# Altium PCB SUBBOARD-power_stage.PcbDoc (part 1 of 2)
Units mm, origin at the board's own origin, x right, y up, seen from the top; angles counter-clockwise.
Board outline 150 x 85 mm, 2 copper layers (Top Layer, Bottom Layer), stack 1.569 mm thick; 73 components, 29 nets, 169 pads, 334 vias.
Unrouted connection lines stored in the file: 3.
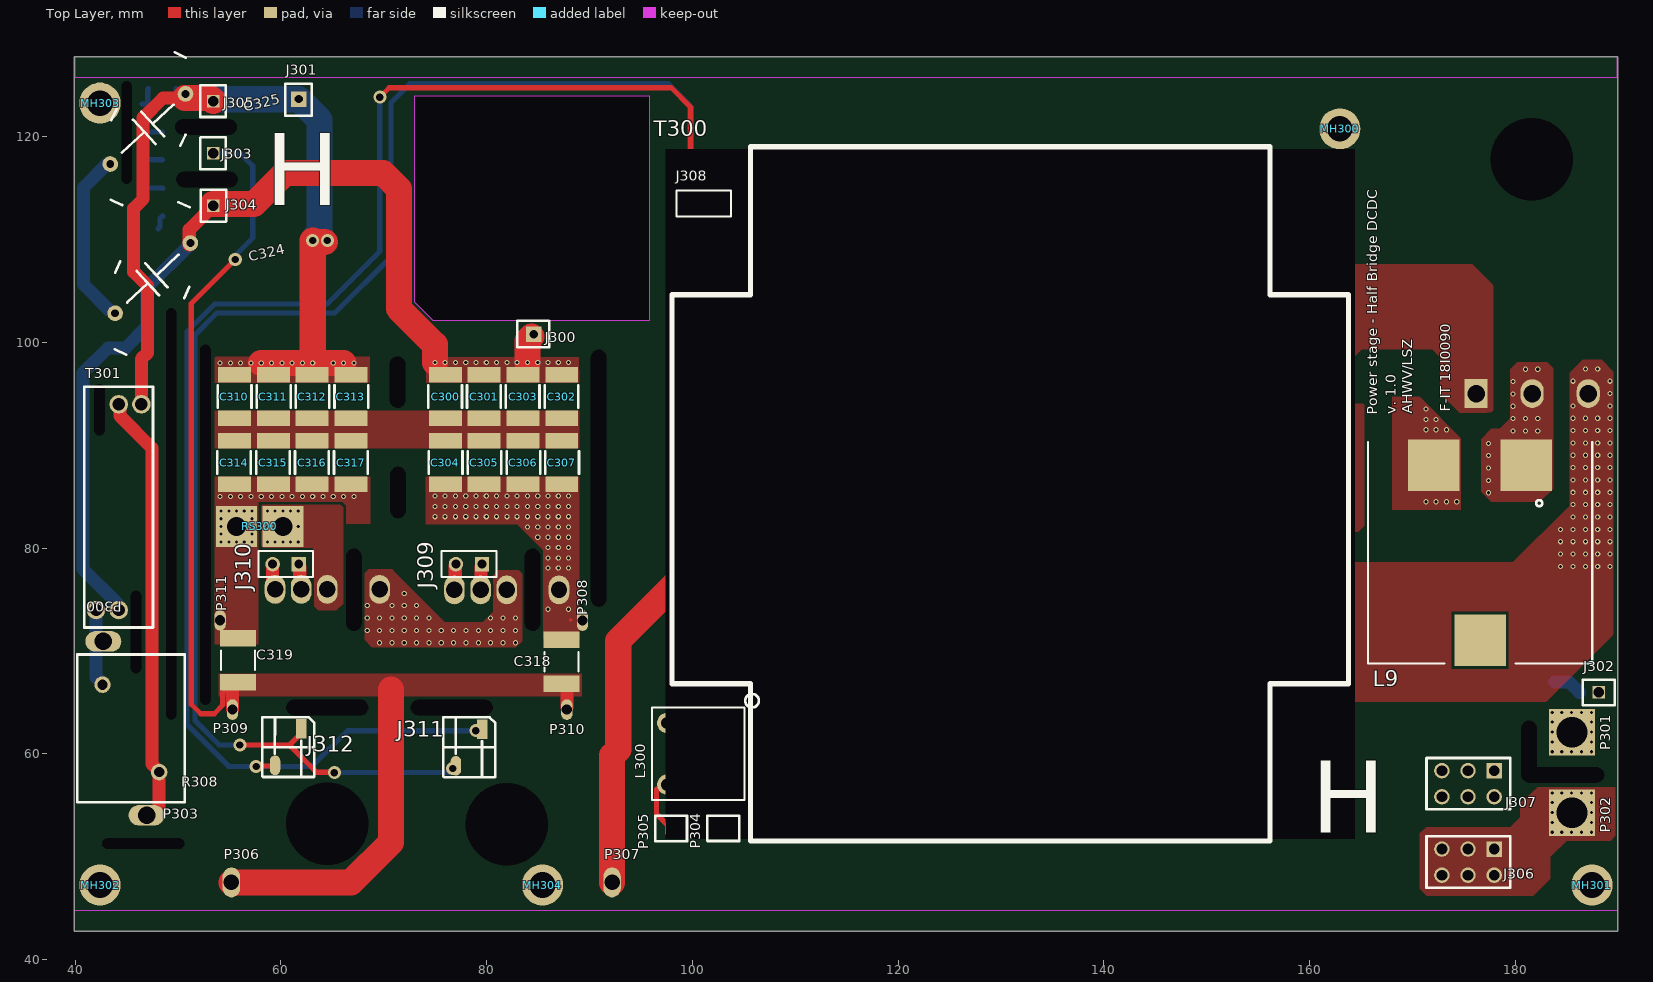
[diagram p0: Top Layer view]
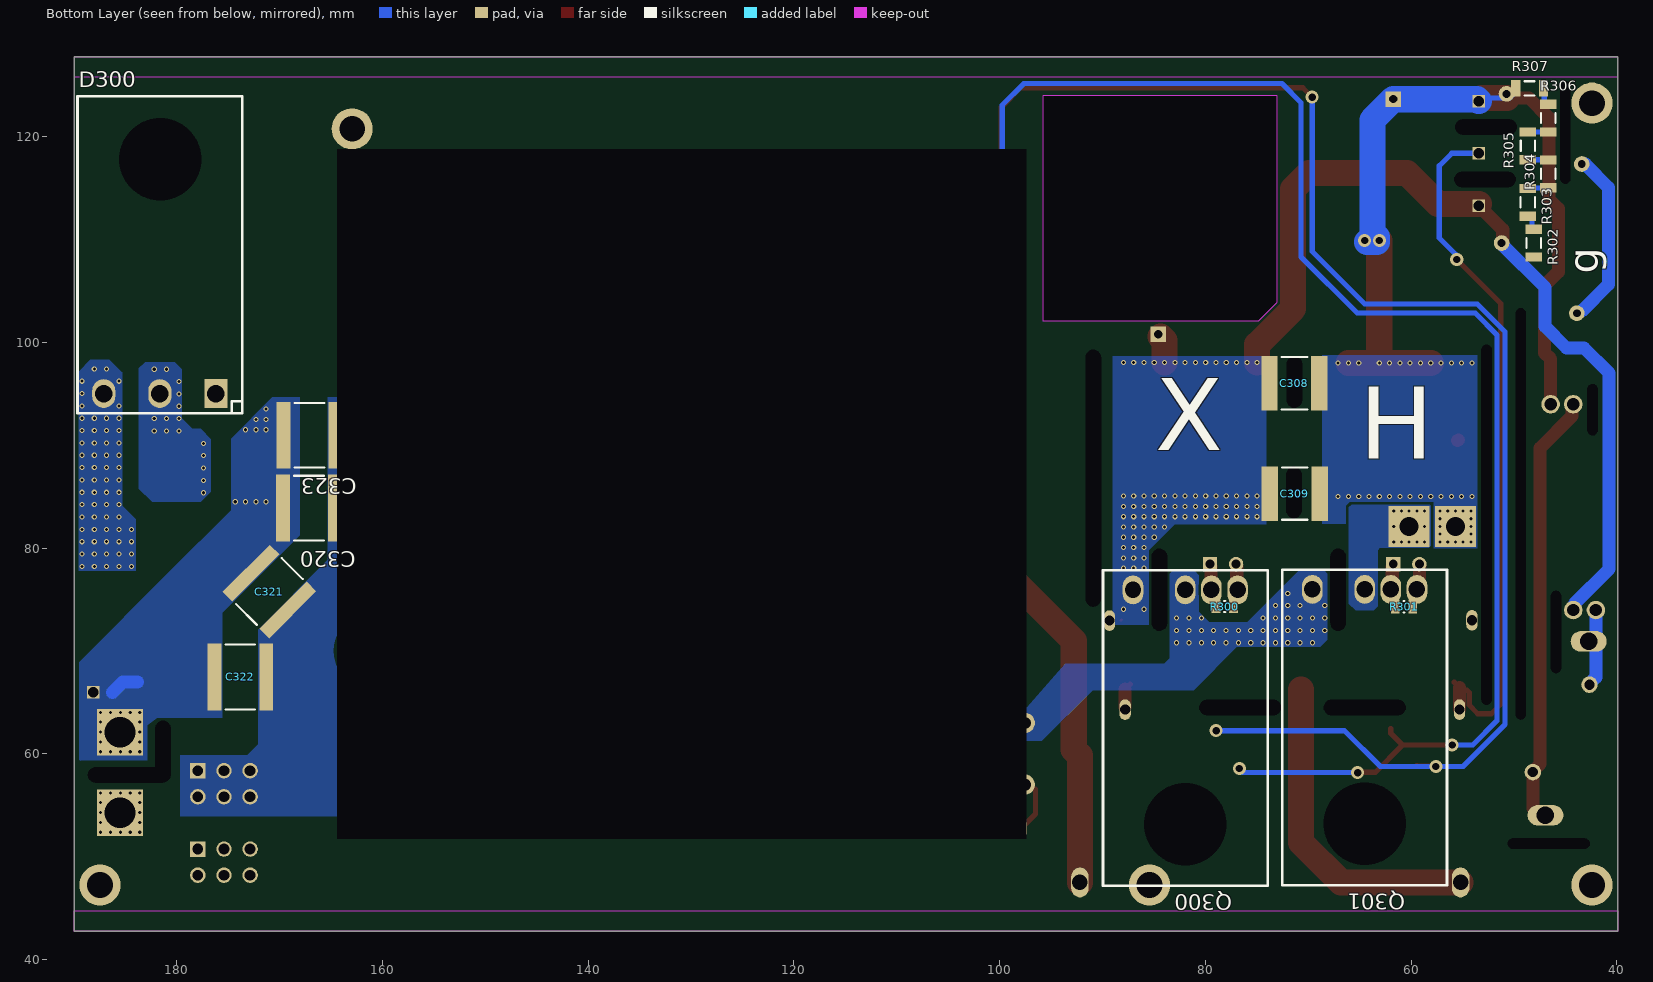
[diagram p1: Bottom Layer view, seen from below]
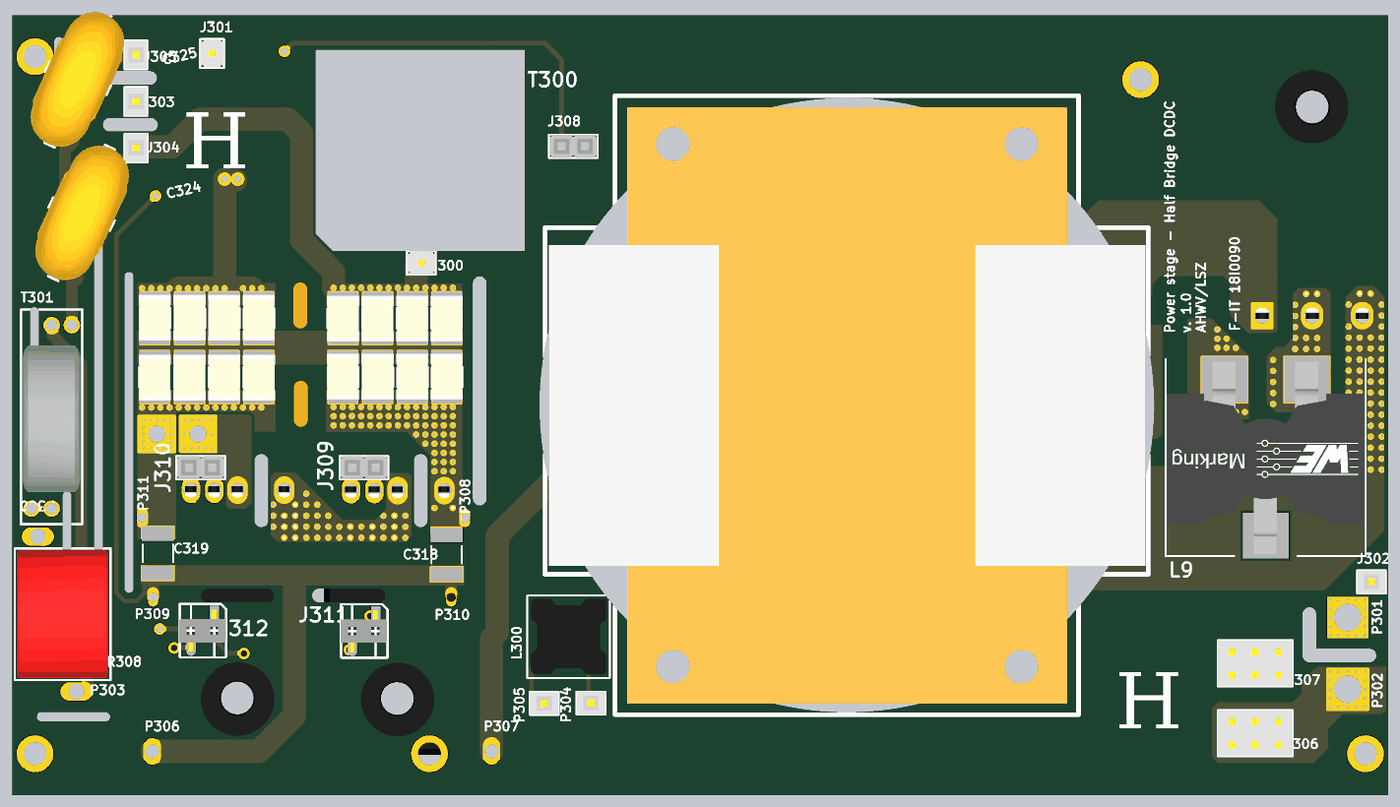
[diagram p2: 3D render of the assembled board from above, using the file's embedded part models]

## Layer stack, top to bottom
Top Solder: solder mask 0.0254, SM-001, Dk 4
Top Layer: signal copper 0.035
Dielectric 1: core 1.4986, Core-043, Dk 4.3
Bottom Layer: signal copper 0.035
Bottom Solder: solder mask 0.0254, SM-001, Dk 4

## Board outline
39.937,42.745 189.937,42.745 189.937,127.745 39.937,127.745
cut-out: 73,123.981 95.825,123.981 95.825,102.075 74.825,102.075 73,103.9

## Design rules (kind name [scope] priority, off if disabled: settings)
Clearance Clearance_DCp [InNet('DCin_P') vs InNet('DCo_P')] p1: gap=0.254 ignorepadtopadclearanceinfootprint=FALSE except(0: Arc-Hole Track-Hole SMDPad-Hole THPad-Hole Via-Hole Fill-Hole Poly-Hole Region-Hole Text-Hole)
Clearance Clearance_DCn [InNet('DCin_N') vs InNet('DCo_N')] p2: gap=0.254 ignorepadtopadclearanceinfootprint=FALSE except(0: Arc-Hole Track-Hole SMDPad-Hole THPad-Hole Via-Hole Fill-Hole Poly-Hole Region-Hole Text-Hole)
Clearance Clearance_HP_DCo_P-N_cap [InNet('DCo_P') vs InNet('DCo_N') and not(InComponent('C25') or InComponent('C26'))] p3: gap=4 ignorepadtopadclearanceinfootprint=FALSE except(0: Arc-Hole Track-Hole SMDPad-Hole THPad-Hole Via-Hole Fill-Hole Poly-Hole Region-Hole Text-Hole)
Clearance Clearance_HP_DCo_P-N_1 [InNet('DCo_P') vs InNet('DCo_N')] p4: gap=4 ignorepadtopadclearanceinfootprint=FALSE except(0: Arc-Hole Track-Hole SMDPad-Hole THPad-Hole Via-Hole Fill-Hole Poly-Hole Region-Hole Text-Hole)
Clearance Clearance_HP_ACts_P-M [InNet('ACts_P') vs InNet('ACts_M')] p5: gap=1.6 ignorepadtopadclearanceinfootprint=FALSE except(0: Arc-Hole Track-Hole SMDPad-Hole THPad-Hole Via-Hole Fill-Hole Poly-Hole Region-Hole Text-Hole)
Clearance Clearance_HP_ACts_P-N [InNet('ACts_P') vs InNet('ACts_N')] p6: gap=1.6 ignorepadtopadclearanceinfootprint=FALSE except(0: Arc-Hole Track-Hole SMDPad-Hole THPad-Hole Via-Hole Fill-Hole Poly-Hole Region-Hole Text-Hole)
Clearance Clearance_HP_ACts_M-N [InNet('ACts_N') vs InNet('ACts_M')] p7: gap=1.6 ignorepadtopadclearanceinfootprint=FALSE except(0: Arc-Hole Track-Hole SMDPad-Hole THPad-Hole Via-Hole Fill-Hole Poly-Hole Region-Hole Text-Hole)
Clearance Clearance_HP_DCf_P-ACts_P [InNet('DCf_P') vs InNet('ACts_P')] p8: gap=1.6 ignorepadtopadclearanceinfootprint=FALSE except(0: Arc-Hole Track-Hole SMDPad-Hole THPad-Hole Via-Hole Fill-Hole Poly-Hole Region-Hole Text-Hole)
Clearance Clearance_HP_DCf_P-ACts_N [InNet('DCf_P') vs InNet('ACts_N')] p9: gap=1.6 ignorepadtopadclearanceinfootprint=FALSE except(0: Arc-Hole Track-Hole SMDPad-Hole THPad-Hole Via-Hole Fill-Hole Poly-Hole Region-Hole Text-Hole)
Clearance Clearance_HP_DCflm_P [InNet('DClm_P')] p10: gap=1.6 ignorepadtopadclearanceinfootprint=FALSE except(0: Arc-Hole Track-Hole SMDPad-Hole THPad-Hole Via-Hole Fill-Hole Poly-Hole Region-Hole Text-Hole)
Clearance Clearance_HP_DCsec [InNet('DClm_P')  or InNet('ACts_N') or InNet('ACts_M') or InNet('ACts_P') or InNet('DCf_P')] p11 off: gap=1.6 ignorepadtopadclearanceinfootprint=FALSE except(0: Arc-Hole Track-Hole SMDPad-Hole THPad-Hole Via-Hole Fill-Hole Poly-Hole Region-Hole Text-Hole)
Clearance Clearance_HP_DCo_P-M [InNet('DCo_P') vs InNet('DCo_M')] p12: gap=2.5 ignorepadtopadclearanceinfootprint=FALSE except(0: Arc-Hole Track-Hole SMDPad-Hole THPad-Hole Via-Hole Fill-Hole Poly-Hole Region-Hole Text-Hole)
Clearance Clearance_HP_DCo_M-N [InNet('DCo_N') vs InNet('DCo_M')] p13: gap=2.5 ignorepadtopadclearanceinfootprint=FALSE except(0: Arc-Hole Track-Hole SMDPad-Hole THPad-Hole Via-Hole Fill-Hole Poly-Hole Region-Hole Text-Hole)
Clearance Clearance_HP_DCo_P [InNet('DCo_P') or InNet('DCin_P') vs (InComponentClass('U_DC_DC_HBridge') or InComponentClass('U_DC_Link') or InComponentClass('U_protection_DC')) and not(InNet('No Net'))] p14: gap=1.7 ignorepadtopadclearanceinfootprint=FALSE except(0: Arc-Hole Track-Hole SMDPad-Hole THPad-Hole Via-Hole Fill-Hole Poly-Hole Region-Hole Text-Hole)
Clearance Clearance_HP_DCo_N [InNet('DCo_N') or InNet('DCin_N') vs (InComponentClass('U_DC_DC_HBridge') or InComponentClass('U_DC_Link') or InComponentClass('U_protection_DC')) and not(InNet('No Net') or InComponent('RS1') or InNet('G2'))] p15: gap=1.7 ignorepadtopadclearanceinfootprint=FALSE except(0: Arc-Hole Track-Hole SMDPad-Hole THPad-Hole Via-Hole Fill-Hole Poly-Hole Region-Hole Text-Hole)
Clearance Clearance_HP_DCo_M [InNet('DCo_M') vs (InComponentClass('U_DC_DC_HBridge') or InComponentClass('U_DC_Link')) and not(InNet('No Net'))] p16: gap=1.7 ignorepadtopadclearanceinfootprint=FALSE except(0: Arc-Hole Track-Hole SMDPad-Hole THPad-Hole Via-Hole Fill-Hole Poly-Hole Region-Hole Text-Hole)
Clearance [All] p17: gap=0.254 ignorepadtopadclearanceinfootprint=FALSE except(0: Arc-Hole Track-Hole SMDPad-Hole THPad-Hole Via-Hole Fill-Hole Poly-Hole Region-Hole Text-Hole)
Height [All] p1: minheight=0 maxheight=35 prefheight=12.7
PolygonConnect PolygonConnect_DCo_N [InNet('DCo_N')] p1: connectstyle=Direct reliefconductorwidth=0.254 reliefentries=4 polygonreliefangle="90 Angle" airgapwidth=0.254
PolygonConnect PolygonConnect_HBridge [InComponentClass('U_DC_DC_HBridge') or InComponentClass('U_insulated_rectifier')] p2: connectstyle=Direct reliefconductorwidth=0.254 reliefentries=4 polygonreliefangle="90 Angle" airgapwidth=0.254
PolygonConnect PolygonConnect_DCo_P [InNet('DCo_P')] p3: connectstyle=Direct reliefconductorwidth=0.254 reliefentries=4 polygonreliefangle="90 Angle" airgapwidth=0.254
PolygonConnect PolygonConnect_DCo_N_1 [InNet('DC_N_shunt') vs InComponent('RS1')] p4: connectstyle=Direct reliefconductorwidth=0.254 reliefentries=4 polygonreliefangle="90 Angle" airgapwidth=0.254
PolygonConnect [All] p5: connectstyle=Direct reliefconductorwidth=0.254 reliefentries=4 polygonreliefangle="90 Angle" airgapwidth=0.254
RoomDefinition U_protection_DC [InComponentClass('U_protection_DC')] p1: confinementstyle=ConfineIn formatcopy=TRUE lockcomponents=FALSE outline 91.475,49.625 29.75,49.625 29.75,131.425 91.475,131.425
RoomDefinition U_DC_DC_HBridge [InComponentClass('U_DC_DC_HBridge')] p2: confinementstyle=ConfineIn formatcopy=TRUE lockcomponents=FALSE outline 53.344,79.744 53.344,84.456 62.556,84.456 62.556,80.21 81.459,80.21 81.459,78.207 90.341,78.207 90.341,46.795 73.579,46.795 73.579,46.845 56.139,46.845 56.139,79.744
RoomDefinition SUBBOARD-power_stage [InComponentClass('SUBBOARD-power_stage')] p3: confinementstyle=ConfineIn formatcopy=TRUE lockcomponents=FALSE outline 34.925,36.74 200.05,36.74 200.05,139.2 34.925,139.2
RoomDefinition U_insulated_rectifier [InComponentClass('U_insulated_rectifier')] p4: confinementstyle=ConfineIn formatcopy=TRUE lockcomponents=FALSE outline 52.944,45.694 52.944,49.306 53.294,49.306 53.294,77.031 88.369,77.031 88.369,77.331 97.516,77.331 97.516,119.504 173.249,119.504 173.249,124.291 190.011,124.291 190.011,92.739 164.274,92.739 164.274,51.006 93.406,51.006 93.406,45.694
RoomDefinition U_output_filter_LC [InComponentClass('U_output_filter_LC')] p5: confinementstyle=ConfineIn formatcopy=TRUE lockcomponents=FALSE outline 163.491,87.266 163.491,94.674 170.649,94.674 170.649,90.994 188.174,90.994 188.174,68.086 177.369,68.086 177.369,56.916 170.211,56.916 170.211,63.866 170.181,63.866 170.181,68.086 165.016,68.086 165.016,80.176 163.571,80.176 163.571,87.266
RoomDefinition U_DC_Link [InComponentClass('U_DC_Link')] p6: confinementstyle=ConfineIn formatcopy=TRUE lockcomponents=FALSE outline 43.225,82.2 89.375,82.2 89.375,143.55 43.225,143.55
RoutingVias [All] p1: holewidth=0.711 width=1.27 viastyle="Through Hole" minholewidth=0.3 minwidth=0.5 maxholewidth=0.711 maxwidth=1.27
SolderMaskExpansion [All] p1: expansion=0.102 istentingtop=FALSE
Width Width_DC_Sec [InNet('ACts_P') or  InNet('ACts_N') or InNet('DCf_P') or InNet('ACts_M') or InNet('DClm_P')] p1: maxlimit=20 minlimit=2.54 preferedwidth=10 minimp=50.000000 maximp=50.000000 favimp=50.000000
Width Width_HP_S [InNetClass('S[1..2]')] p2: maxlimit=3.302 minlimit=0.254 preferedwidth=0.508 minimp=50.000000 maximp=50.000000 favimp=50.000000
Width Width_HP_DCo [InNet('DCo_P') or InNet('DCo_N') or InNet('DCo_M')] p3: maxlimit=3.302 minlimit=0.254 preferedwidth=2.54 minimp=50.000000 maximp=50.000000 favimp=50.000000
Width Width_ACres_N [InNet('ACres_N')] p4: maxlimit=3.302 minlimit=0.254 preferedwidth=2.54 minimp=50.000000 maximp=50.000000 favimp=50.000000
Width Width_ACres2_N [InNet('ACres2_N')] p5: maxlimit=3.302 minlimit=0.254 preferedwidth=2.54 minimp=50.000000 maximp=50.000000 favimp=50.000000
Width [All] p6: maxlimit=1.27 minlimit=0.254 preferedwidth=0.508 minimp=50.000000 maximp=50.000000 favimp=50.000000
29 further rules are at their usual default settings.

## Classes and differential pairs
component class U_protection_DC: C324 C325 R308 T301
component class SUBBOARD-power_stage: J300 J301 J302 J303 J304 J305 J306 J307 J308 L300 MH300 MH301 MH302 MH303 MH304 P300 P301 P302 P303 P304 P305
component class U_output_filter_LC: C320 C321 C322 C323 L9
net class S[1..2]: S1 S2
net class G[1..2]: G1 G2
component class U_insulated_rectifier: C318 C319 D300 P306 P307 P308 P309 P310 P311 T300
component class U_DC_Link: C300 C301 C302 C303 C304 C305 C306 C307 C308 C309 C310 C311 C312 C313 C314 C315 C316 C317 R302 R303 R304 R305 R306 R307
component class U_DC_DC_HBridge: J309 J310 J311 J312 Q300 Q301 R300 R301 RS300

## Components (designator, comment, footprint, x,y, rotation, side; value= is the part's Value field where it differs from the comment)
C300 "CKG45NX7T2J474M500JH" C_1812_CKG45NX7T2J474M500JH 76.01,94.73 r90 top
C301 "CKG45NX7T2J474M500JH" C_1812_CKG45NX7T2J474M500JH 79.77,94.73 r90 top
C302 "CKG45NX7T2J474M500JH" C_1812_CKG45NX7T2J474M500JH 87.31,94.73 r90 top
C303 "CKG45NX7T2J474M500JH" C_1812_CKG45NX7T2J474M500JH 83.55,94.73 r90 top
C304 "CKG45NX7T2J474M500JH" C_1812_CKG45NX7T2J474M500JH 75.99,88.31 r270 top
C305 "CKG45NX7T2J474M500JH" C_1812_CKG45NX7T2J474M500JH 79.77,88.31 r270 top
C306 "CKG45NX7T2J474M500JH" C_1812_CKG45NX7T2J474M500JH 83.55,88.31 r270 top
C307 "CKG45NX7T2J474M500JH" C_1812_CKG45NX7T2J474M500JH 87.31,88.31 r270 top
C308 "2220GC103KAT1A" CAPC5750X330X64LL40T39 71.35,96 r0 bottom
C309 "2220GC103KAT1A" CAPC5750X330X64LL40T39 71.33,85.3 r0 bottom
C310 "CKG45NX7T2J474M500JH" C_1812_CKG45NX7T2J474M500JH 55.48,94.73 r270 top
C311 "CKG45NX7T2J474M500JH" C_1812_CKG45NX7T2J474M500JH 59.28,94.73 r270 top
C312 "CKG45NX7T2J474M500JH" C_1812_CKG45NX7T2J474M500JH 63.04,94.73 r270 top
C313 "CKG45NX7T2J474M500JH" C_1812_CKG45NX7T2J474M500JH 66.82,94.73 r270 top
C314 "CKG45NX7T2J474M500JH" C_1812_CKG45NX7T2J474M500JH 55.48,88.31 r90 top
C315 "CKG45NX7T2J474M500JH" C_1812_CKG45NX7T2J474M500JH 59.28,88.31 r90 top
C316 "CKG45NX7T2J474M500JH" C_1812_CKG45NX7T2J474M500JH 63.05,88.31 r90 top
C317 "CKG45NX7T2J474M500JH" C_1812_CKG45NX7T2J474M500JH 66.84,88.31 r90 top
C318 "CAP 10nF 500V 1812(4532)" CAPC1812(4532)230_M 87.3,68.95 r90 top value=10nF
C319 "CAP 10nF 500V 1812(4532)" CAPC1812(4532)230_M 55.825,69.1 r270 top value=10nF
C320 "CAP 1uF 200V 2225(5664)" CAPC2225(5664)230_L 167.15,83.88 r0 bottom value=1uF
C321 "CAP 1uF 200V 2225(5664)" CAPC2225(5664)230_L 170.98,75.77 r45 bottom value=1uF
C322 "CAP 1uF 200V 2225(5664)" CAPC2225(5664)230_L 173.81,67.48 r0 bottom value=1uF
C323 "CAP 1uF 200V 2225(5664)" CAPC2225(5664)230_L 167.07,90.97 r0 bottom value=1uF
C324 "AY1392M61Y5UC63L0" AY1392M61Y5UC63L0 51.214,109.645 r223 top value="3.9 nF"
C325 "AY1392M61Y5UC63L0" AY1392M61Y5UC63L0 43.425,117.325 r43 top value="3.9 nF"
D300 "C3D20065D" TO-247-3_HSA 181.63,95.01 r0 bottom
J300 "CES-101-01-T-S" CES-101-01-T-S 84.597,100.782 r0 top
J301 "CES-101-01-T-S" CES-101-01-T-S 61.737,123.642 r90 top
J302 "SSW-101-01-G-S" SAM1209-01-ND 188.097,65.985 r90 top
J303 "SSW-101-01-G-S" SAM1209-01-ND 53.437,118.365 r0 top
J304 "SSW-101-01-G-S" SAM1209-01-ND 53.437,113.285 r180 top
J305 "SSW-101-01-G-S" SAM1209-01-ND 53.437,123.445 r0 top
J306 "SSW-103-01-G-D" SSW-103-01-G-D 177.937,50.745 r270 top
J307 "SSW-103-01-G-D" SSW-103-01-G-D 177.937,58.365 r270 top
J308 "SLW-102-01-T-S" SMTC-SLW-102-01-X-S 99.837,113.482 r0 top
J309 "SLW-102-01-T-S" SMTC-SLW-102-01-X-S 79.56,78.436 r180 top
J310 "SLW-102-01-T-S" SMTC-SLW-102-01-X-S 61.75,78.436 r180 top
J311 "SSM-102-L-SV" SSM-102-L-SV 79.56,62.4 r270 top
J312 "SSM-102-L-SV" SSM-102-L-SV 61.98,62.433 r270 top
L9 "7443630700" WE-HCF-2013 176.57,79.54 r270 top
L300 "PA0368.050NLT" PA0368.050NLT 103.575,63 r270 top
MH300 "_MH_2p5_4-round" _MH_2p5_4-round 162.937,120.745 r0 top
MH301 "_MH_2p5_4-round" _MH_2p5_4-round 187.437,47.245 r0 top
MH302 "_MH_2p5_4-round" _MH_2p5_4-round 42.437,47.245 r0 top
MH303 "_MH_2p5_4-round" _MH_2p5_4-round 42.437,123.245 r0 top
MH304 "_MH_2p5_4-round" _MH_2p5_4-round 85.434,47.245 r0 top
P300 "Test_Point_1p7" _TP_1p7 42.75,70.925 r180 top
P301 "Test_Point_3_4p5_square_vias" _TP_3_4P5_SQUARE_VIAS 185.5,62.1 r0 top
P302 "Test_Point_3_4p5_square_vias" _TP_3_4P5_SQUARE_VIAS 185.5,54.275 r0 top
P303 "Test_Point_1p7" _TP_1p7 46.95,54.025 r180 top
P304 "SSW-101-01-G-S" SAM1209-01-ND 103.015,52.775 r90 top
P305 "SSW-101-01-G-S" SAM1209-01-ND 97.937,52.745 r90 top
P306 "Test_Point_1p5" _TP_1p5 55.2,47.5 r90 top
P307 "Test_Point_1p5" _TP_1p5 92.2,47.5 r90 top
P308 "Test_Point_1" _TP_1mm 89.325,72.95 r270 top
P309 "Test_Point_1" _TP_1mm 55.3,64.3 r90 top
P310 "Test_Point_1" _TP_1mm 87.8,64.3 r90 top
P311 "Test_Point_1" _TP_1mm 54.1,72.975 r90 top
Q300 "SCT3105KR" TO-247-4L_hsa 87.04,75.936 r180 bottom
Q301 "SCT3105KR" TO-247-4L_hsa 69.6,75.986 r180 bottom
R300 "10K 5% 0805(2012)" RESC0805(2012)_L 78.12,74.316 r0 bottom value="10000.00 Ohm"
R301 "10K 5% 0805(2012)" RESC0805(2012)_L 60.69,74.286 r0 bottom value="10000.00 Ohm"
R302 "CRCW12064M70FKEA" RESC3216X60X45LL10T20 48.075,109.65 r90 bottom value="4.7 MOhms"
R303 "CRCW12064M70FKEA" RESC3216X60X45LL10T20 48.675,113.6 r90 bottom value="4.7 MOhms"
R304 "CRCW12064M70FKEA" RESC3216X60X45LL10T20 46.675,116.375 r90 bottom value="4.7 MOhms"
R305 "CRCW12064M70FKEA" RESC3216X60X45LL10T20 48.65,119.1 r90 bottom value="4.7 MOhms"
R306 "CRCW12064M70FKEA" RESC3216X60X45LL10T20 46.675,121.8 r90 bottom value="4.7 MOhms"
R307 "CRCW12064M70FKEA" RESC3216X60X45LL10T20 48.5,124.675 r0 bottom value="4.7 MOhms"
R308 "V1000LA80AP" V1000LA80AP 48.175,58.225 r90 top
RS300 "SDN-414" SDN-414 55.7,82.1 r0 top
T300 "SMPS Transformer" Payton_SMPS_trafo_61446 130.91,85.25 r0 top
T301 "B64290L0045X038" B64290L0045X038 42.05,73.975 r90 top

## Footprints (in the part's own frame and the unit in brackets; to place one, negate y for a bottom-side part, rotate by r counter-clockwise, add the part's x,y. Pads: shape width x height; smd on the part's side, far side on the other; paste and mask are expansions set on the pad)
_MH_2p5_4-round [mm] "Matching hole, 2.5mm hole, 4mm pad (round)"
  round 4 hole 2.5: *(0,0)
_TP_1mm [mm] "test point 1mm"
  oval 2x1.1 hole 1: 1(0,0)
_TP_1p5 [mm] "test point 1.5mm"
  oval 2.9x1.7 hole 1.5: 1(0,0)
_TP_1p7 [mm]
  oval 3.5x2 hole 1.7: 1(0,0)
_TP_3_4P5_SQUARE_VIAS [mm]
  rect 4.5x4.5 hole 3: 1(0,0)
AY1392M61Y5UC63L0 [mil] "Safety capacitor X-Y 3.9nF AY1392M61Y5UC63L0"
  round 60 hole 30: 1(0,0) 2(393.7,0)
  silkscreen extent -92,-146 489,145, body extent -137,-243 532,245, height 738
B64290L0045X038 [mm] "Ferrite toroid 16x9.6x6.3"
  round 1.8 hole 1.2: 1(0,0) 2(0,-2.2) 3(20,-2.2) 4(20,-4.4)
  silkscreen extent -1.7,-5.53 21.7,1.15, body extent 1.78,-5.32 17.77,0.98, height 16.5
C_1812_CKG45NX7T2J474M500JH [mm]
  rect 1.5x3.2 smd: 1(-2.125,0) 2(2.125,0)
  silkscreen extent -1.1,-1.6 1.1,1.67, body extent -2.55,-1.75 2.45,1.75, height 5
CAPC1812(4532)230_M [mm] "Chip Capacitor, Body 4.5x3.2mm, Height 2.3mm, IPC Low Density"
  rect 1.6x3.5 smd: 1(-2.15,0) 2(2.15,0)
  silkscreen extent -0.95,-1.65 0.95,1.65, body extent -2.4,-1.7 2.4,1.7, height 2.3
CAPC2225(5664)230_L [mm] "Chip Capacitor, Body 5.7x6.4mm, Height 2.3mm, IPC High Density"
  rect 1.35x6.5 smd: 1(-2.525,0) 2(2.525,0)
  silkscreen extent -1.45,-3.15 1.45,3.15, body extent -3,-3.4 3,3.4, height 2.3
CAPC5750X330X64LL40T39 [mm] "Chip Capacitor, 2-Leads, Body 6.1x5.4mm, IPC High Density"
  rect 1.6x5.3 smd: 1(-2.425,0) 2(2.425,0)
  silkscreen extent -1.25,-2.55 1.25,2.55, body extent -3.05,-2.7 3.05,2.7, height 3.3
CES-101-01-T-S [mm]
  rect 1.5x1.5 hole 0.81: 1(0,0)
  silkscreen extent -1.62,-1.28 1.5,1.31, body extent -1.55,-1.28 1.5,1.26, height 5.09
PA0368.050NLT [mm] "Current Transformer 1:50 500Vrms 0.004Ohm Prim. DCR 0.9Ohm Sec. DCR 4000mA Surface Mount"
  rect 2x2 hole 1.2: 1(0,0)
  round 2 hole 1.2: 2(6,0) 3(6,-6) 4(0,-6)
  silkscreen extent -2.82,-7.5 7.5,2.89, body extent -1.15,-7.11 7.11,1.15, height 2.55
Payton_SMPS_trafo_61446 [mm]
  round 4.2 hole 2.1: 1(-30.1,15.24) 5(-30.1,-15.24) 6(30.1,15.24) 8(30.1,0) 10(30.1,-15.24)
  round 1.524 hole 67 square unplated: 2(0,0)
  round 5 hole 3.7: ""(-19,-28.5) ""(-19,28.5) ""(19,-28.5) ""(19,28.5)
  silkscreen extent -32.89,-33.74 32.86,33.75, body extent -32.45,-32.53 32.55,32.47, height 28.2
RESC0805(2012)_L [mm] "Chip Resistor, Body 2.0x1.3mm, IPC High Density"
  rect 0.85x1.3 smd: 1(-0.85,0) 2(0.85,0)
  silkscreen extent -0.05,-0.55 0.05,0.55, body extent -1.1,-0.67 1.1,0.68, height 0.7
RESC3216X60X45LL10T20 [mm] "Chip Resistor, 2-Leads, Body 3.20x1.60mm, IPC High Density"
  rect 0.9x1.6 smd: 1(-1.35,0) 2(1.35,0)
  silkscreen extent -0.5,-0.7 0.5,0.7, body extent -1.65,-0.85 1.65,0.85, height 0.6
SAM1209-01-ND [mm]
  rect 1.2x1.2 hole 1.02: 1(0,0)
  silkscreen extent -1.25,-1.55 1.22,1.55, body extent -1.21,-1.52 1.21,1.52, height 8.52
SDN-414 [mm]
  rect 4x4 hole 1.85: 1(0,0) 2(4.5,0)
SMTC-SLW-102-01-X-S [mm] "Low Profile Socket Strip, 1x2 Pins, Vertical, 2.54mm Pitch, Female"
  rect 1.4x1.4 hole 0.86: 1(0,0)
  round 1.4 hole 0.86: 2(2.54,0)
  silkscreen extent -1.4,-1.27 3.94,1.27, body extent -1.27,-1.27 3.81,1.27, height 4.57
SSM-102-L-SV [mm]
  rect 1.905x1.02 smd: 1(0,0)
  oval 1.905x1.02 smd: 2(3.555,-2.54)
  silkscreen extent -1.14,-3.77 4.69,1.29, body extent -0.51,-3.83 4.07,1.25, height 7.51
SSW-103-01-G-D [mm]
  rect 1.5x1.5 hole 1.04: 1(0,0)
  round 1.5 hole 1.04: 2(2.54,0) 3(0,-2.54) 4(2.54,-2.54) 5(0,-5.08) 6(2.54,-5.08)
  silkscreen extent -1.22,-6.58 3.75,1.58, body extent -1.2,-6.57 3.76,1.56, height 8.52
TO-247-3_HSA [mm]
  rect 2.24x2.8 hole 1.7: 1(-5.45,0)
  oval 2.24x2.8 hole 1.7: 2(0,0) 3(5.45,0)
  round 7 hole 8 unplated: *(-0.05,-22.78)
  silkscreen extent -8,-28.9 8,1.89, body extent -8,-28.9 8,0.35, height 5.2
TO-247-4L_hsa [mm] "TO-247-4L package, horizontal, heat sink above"
  oval 2x2.8 hole 1.6: 1(0,0) 2(5.08,0) 3(7.62,0) 4(10.16,0)
  round 7 hole 8 unplated: *(5.08,-22.78)
  silkscreen extent -2.92,-28.76 13.08,1.89, body extent -2.88,-28.81 13.12,0.44, height 5.1
V1000LA80AP [mm] "Varistor 1200V V1000LA80AP"
  round 1.6 hole 1: 1(0,0) 2(8.5,5.5)
  silkscreen extent -2.95,-2.47 11.42,7.95, body extent -2.75,-2.25 11.25,7.75, height 20.5
WE-HCF-2013 [mm] "SMD Inductor, 3-Leads, Body 21.5 x 21.0 mm"
  rect 5x5 smd: 1(-8.5,4.5) 2(-8.5,-4.5) 3(8.5,0)
  silkscreen extent -10.75,-10.9 10.75,10.9, body extent -10.45,-10.8 10.55,10.7, height 13.98

## Part data
C300 C301 C302 C303 C304 C305 C306 C307 C310 C311 C312 C313 C314 C315 C316 C317: "TDK         CKG45NX7T2J474M500JH             SMD Multilayer Ceramic Capacitor, 1812 [4532 Metric], 0.47 F, 630 V,  20%, X7T, CKG Series", Capacitance=470nF, Case Code (Imperial)=1812, Case Code (Metric)=4532, Case/Package=SMD/SMT, Dielectric=X7T, Manufacturer=TDK, Max Operating Temperature=125°C, Min Operating Temperature=-55°C, Package Quantity=1, Supplier Part Number 1=445-7101-1-ND, Tolerance=20%, Voltage Rating=630V, Category="Ceramic Capacitors", ComponentLink1Description=https://datasheet.ciiva.com/24221/ckg45nx7t2j474m500jh-24221101.pdf?src-supplier=Mouser, ComponentLink1URL=https://datasheet.ciiva.com/24221/ckg45nx7t2j474m500jh-24221101.pdf?src-supplier=Mouser, ComponentLink2Description=https://datasheet.ciiva.com/6253/mlcc-commercial-megacap-en-6253704.pdf?src-supplier=Digi-Key, ComponentLink2URL=https://datasheet.ciiva.com/6253/mlcc-commercial-megacap-en-6253704.pdf?src-supplier=Digi-Key, ComponentLink3Description=https://datasheet.ciiva.com/6253/mlcc-commercial-megacap-en-6253702.pdf?src-supplier=Digi-Key, ComponentLink3URL=https://datasheet.ciiva.com/6253/mlcc-commercial-megacap-en-6253702.pdf?src-supplier=Digi-Key, Composition=Ceramic, Depth=3.5mm, Height=5mm, Length=5mm, Manufacturer Part Number=CKG45NX7T2J474M500JH, Mount="Surface Mount", Packaging="Tape and Reel", Pricing 1="1=4,71000, 10=3,79500, 100=2,96010, 500=2,20110 (USD)", REACH SVHC="No SVHC", RoHS=Yes, Stock 1=1650, Supplier 1=Digi-Key, Termination=Metal, Thickness=0.217inch, Voltage Rating (DC)=630V, Width=0.138inch
C308 C309: library part CMP-2000-05534-1, "Chip Capacitor, 10000 pF, +/- 10%, 2000 V, -55 to 125 degC, 2220 (5750 Metric), RoHS, Tape and Reel", Capacitance=10nF, Case Size/Dimension=2220, Dielectric=X7R, Manufacturer=AVX, Package Description="2-Pin Surface Mount Device, Body 5.7 x 5 mm", Rated Voltage=2000V, Tolerance (%)=±10%, Datasheet URL=http://datasheets.avx.com/HighVoltageAutoMLCC.pdf, Datasheet Version=06/2016, Manufacturer URL=http://www.avx.com/, Mounting Technology=SurfaceMount, Package Reference=2220
C318 C319: library part CMP-1040-00850-1, "CAP 10nF 500V ±10% 1812 (4532 Metric) Thickness 2.3mm SMD", Case-EIA=1812, Case-Metric=4532, Rated Voltage="500 V", Tolerance=Â±10%, Max Thickness="2.3 mm", Technology=SMT
C320 C321 C322 C323: library part CMP-1043-00930-1, "CAP 1uF 200V ±10% 2225 (5664 Metric) Thickness 2.2mm SMD", Case-EIA=2225, Case-Metric=5664, Rated Voltage="200 V", Tolerance=Â±10%, Max Thickness="2.2 mm", Technology=SMT
C324 C325: "Cap Ceramic 0.0039uF 1500V Y5U 20% Through Hole 10mm Radial 125°C Bulk", Manufacturer=Vishay, Supplier Part Number 1=BC5432-ND, Manufacturer Part Number=AY1392M61Y5UC63L0, Pricing 1="1=0,81000, 10=0,61800, 100=0,44180, 500=0,34200, 1000=0,29450, 2500=0,27550, 5000=0,26125 (USD)", Stock 1=472, Supplier 1=Digi-Key, Supplier 2=Farnell, Supplier 3=Newark, Supplier Part Number 2=2987310, Supplier Part Number 3=95AC5614
D300: "Schottky Diodes & Rectifiers Schottky Diode 2X10A, 650V C3D20065D", Case/Package=TO-247, Forward Current=55A, Manufacturer=Cree, Max Repetitive Reverse Voltage (Vrrm)=650V, Supplier Part Number 1=941-C3D20065D, Category="Rectifier Diodes", ComponentLink1Description=http://www.mouser.com/ds/2/90/3d20065d_silicon_carbide_schottky_diode_z_rec_rect-838556.pdf?src-supplier=Mouser, ComponentLink1URL=http://www.mouser.com/ds/2/90/3d20065d_silicon_carbide_schottky_diode_z_rec_rect-838556.pdf?src-supplier=Mouser, ComponentLink2Description=http://www.farnell.com/datasheets/1821848.pdf?src-supplier=Element14, ComponentLink2URL=http://www.farnell.com/datasheets/1821848.pdf?src-supplier=Element14, ComponentLink3Description=http://www.wolfspeed.com/media/downloads/102/C3D20065D.pdf?src-supplier=Digi-Key, ComponentLink3URL=http://www.wolfspeed.com/media/downloads/102/C3D20065D.pdf?src-supplier=Digi-Key, ComponentLink4Description=https://www.wolfspeed.com/downloads/dl/file/id/102/product/74/c3d20065d.pdf?src-supplier=Digi-Key, ComponentLink4URL=https://www.wolfspeed.com/downloads/dl/file/id/102/product/74/c3d20065d.pdf?src-supplier=Digi-Key, Element Configuration="Common Cathode", Manufacturer Part Number=C3D20065D, Number of Pins=3, Packaging="Cut Tape", Pricing 1="1 = 10.17000, 100 = 8.47000, 500 = 7.26000, 1000 = 6.36000 (USD)", Pricing 2="1=10,17000, 100=8,47000, 500=7,26004, 1000=6,36001 (USD)", REACH SVHC="No SVHC", RoHS=Yes, Stock 1=7, Stock 2=143, Supplier 1=Mouser, Supplier 2=Digi-Key, Supplier Part Number 2=C3D20065D-ND
J300 J301: "Conn Socket Strip SKT 1 POS Solder ST Thru-Hole", Color=Black, Manufacturer=Samtec, Package Quantity=1, Supplier Part Number 1=SAM1087-01-ND, Category=Connectors, ComponentLink1Description=https://datasheet.ciiva.com/413/ces-mkt-413326.pdf?src-supplier=Digi-Key, ComponentLink1URL=https://datasheet.ciiva.com/413/ces-mkt-413326.pdf?src-supplier=Digi-Key, Connector Type=Receptacle, Contact Material=Bronze, Contact Plating=Tin, Gender=Receptacle, Height=5.08mm, Housing Color=Black, Housing Material=Plastic, Lead Free="Lead Free", Length=2.54mm, Manufacturer Part Number=CES-101-01-T-S, Mount="Through Hole", Number of Contacts=1, Number of Positions=1, Number of Rows=1, Packaging=Bulk, Pricing 1="1=0.18000, 10=0.16800, 25=0.12520, 50=0.10720, 100=0.10370, 250=0.08940, 500=0.08582 (USD)", Radiation Hardening=No, REACH SVHC="No SVHC", RoHS=Yes, Stock 1=3369, Supplier 1=Digi-Key, System=Connector, Termination=Solder, Width=3.05mm
J302 J303 J304 J305 P304 P305: "CLEAR GLOVE BX 100 M - More Details", Color=Black, Contact Resistance=10mR, Manufacturer=Samtec, Max Current Rating=6.9A, Max Operating Temperature=125°C, Max Voltage Rating (AC)=550V, Min Operating Temperature=-55°C, Supplier Part Number 1=SAM1209-01-ND, Category=Connectors, ComponentLink1Description=https://datasheet.ciiva.com/749/ssw-1xx-xx-xxx-x-xx-xxx-xx-mkt-749879.pdf?src-supplier=Digi-Key, ComponentLink1URL=https://datasheet.ciiva.com/749/ssw-1xx-xx-xxx-x-xx-xxx-xx-mkt-749879.pdf?src-supplier=Digi-Key, Connector Type=Receptacle,Socket, Contact Material=Bronze, Contact Plating=Gold, Depth=2.41mm, Gender=Receptacle, Housing Color=Black, Housing Material=Polymer, Lead Free="Lead Free", Length=3.05mm, Manufacturer Part Number=SSW-101-01-G-S, Mating Cycles=100, Mount="Through Hole", Number of Contacts=1, Number of Positions=1, Number of Rows=1, Orientation=Straight, Packaging=Bulk, Pricing 1="1=0.25000, 10=0.23600, 25=0.20120, 50=0.17600, 100=0.16350, 250=0.14464, 500=0.13834 (USD)", Radiation Hardening=No, REACH SVHC="No SVHC", RoHS=Yes, Stock 1=10228, Supplier 1=Digi-Key, System=Connector, Termination=Solder, Width=2.41mm
J306 J307: "Conn Socket Strip SKT 6 POS 2.54mm Solder ST Thru-Hole", Color=Black, Contact Resistance=10mR, Current Rating=6.9A, Manufacturer=Samtec, Max Operating Temperature=125°C, Max Voltage Rating (AC)=550V, Min Operating Temperature=-55°C, Supplier Part Number 1=SAM1208-03-ND, Category="Headers and Wire Housings", ComponentLink1Description=https://datasheet.ciiva.com/25617/0900766b8115c03d-25617399.pdf?src-supplier=RSComponents, ComponentLink1URL=https://datasheet.ciiva.com/25617/0900766b8115c03d-25617399.pdf?src-supplier=RSComponents, ComponentLink2Description=https://datasheet.ciiva.com/22677/82032-22677622.pdf?src-supplier=Element14, ComponentLink2URL=https://datasheet.ciiva.com/22677/82032-22677622.pdf?src-supplier=Element14, ComponentLink3Description=https://datasheet.ciiva.com/749/ssw-1xx-xx-xxx-x-xx-xxx-xx-mkt-749828.pdf?src-supplier=Digi-Key, ComponentLink3URL=https://datasheet.ciiva.com/749/ssw-1xx-xx-xxx-x-xx-xxx-xx-mkt-749828.pdf?src-supplier=Digi-Key, Connector Type=Receptacle,Socket, Contact Material=Bronze, Contact Plating=Gold, Depth=4.95mm, Gender=Receptacle, Housing Color=Black, Housing Material=Polymer, Lead Free="Lead Free", Length=8.13mm, Manufacturer Part Number=SSW-103-01-G-D, Mating Cycles=100, Max Current Rating=6.9A, Mount="Through Hole", Number of Contacts=6, Number of Positions=6, Number of Rows=2, Orientation=Vertical, Packaging=Bulk, Pitch=2.54mm, Pricing 1="1=0.93000, 10=0.82100, 25=0.77240, 50=0.74020, 100=0.70800, 250=0.64368, 500=0.57932 (USD)", Radiation Hardening=No, REACH SVHC="No SVHC", RoHS=Yes, Row Spacing=0.1inch, Stock 1=1397, Supplier 1=Digi-Key, Termination=Solder, Voltage Rating=550V
J308 J309 J310: library part CMP-1023-00124-1, "Low Profile Socket Strips, Through-hole, Vertical, -55 to 105 degC, 2.54 mm Pitch, 2-Pin, Female, RoHS", Manufacturer=Samtec, Temperature Range="-55 to 105 degC", ComponentLink1Description="Manufacturer URL", ComponentLink1URL=http://www.samtec.com, ComponentLink2Description=Datasheet, ComponentLink2URL=http://www.samtec.com/documents/webfiles/pdf/SLW.PDF, ComponentLink3Description="Package Specification", ComponentLink3URL=http://www.samtec.com/documents/webfiles/cpdf/SLW-1XX-01-X-X-MKT.pdf, DatasheetVersion=F-214, Mounting Technology=Through-hole, Orientation=Vertical, PackageDescription="Low Profile Socket Strip", PackageReference=SLW-102-01-X-S, PackageVersion="X, 9/1987", PartNumber=SLW-102-01-T-S, Pitch="2.54 mm", RoHS=True, System=Connector
J311 J312: "SAMTEC - SSM-102-L-SV - RECEPTACLE, 2.54MM, VERT, 2WAY", Color=Black, Contact Resistance=10mR, Current Rating=6.9A, Manufacturer=Samtec, Max Operating Temperature=125°C, Max Voltage Rating (AC)=475V, Min Operating Temperature=-55°C, Supplier Part Number 1=SAM1148-02-ND, Category="Headers and Wire Housings", ComponentLink1Description=https://datasheet.ciiva.com/25617/0900766b811594ab-25617394.pdf?src-supplier=RSComponents, ComponentLink1URL=https://datasheet.ciiva.com/25617/0900766b811594ab-25617394.pdf?src-supplier=RSComponents, ComponentLink2Description=https://datasheet.ciiva.com/746/ssm-1xx-xxx-xx-xx-xx-x-xx-xx-mkt-746741.pdf?src-supplier=Digi-Key, ComponentLink2URL=https://datasheet.ciiva.com/746/ssm-1xx-xxx-xx-xx-xx-x-xx-xx-mkt-746741.pdf?src-supplier=Digi-Key, ComponentLink3Description=https://datasheet.ciiva.com/22677/81944-22677814.pdf?src-supplier=Element14, ComponentLink3URL=https://datasheet.ciiva.com/22677/81944-22677814.pdf?src-supplier=Element14, Connector Type=Receptacle,Socket, Contact Material=Bronze, Contact Plating=Gold, Depth=2.54mm, Gender=Receptacle, Housing Color=Black, Housing Material=Polymer, Lead Free="Lead Free", Lead Pitch=2.54mm, Length=5.08mm, Manufacturer Part Number=SSM-102-L-SV, Max Current Rating=6.9A, Mount="Surface Mount", Number of Contacts=2, Number of Positions=2, Number of Rows=1, Orientation=Straight, Packaging=Bulk, Pitch=2.54mm, Pricing 1="1=0.56000, 10=0.52100, 25=0.46920, 50=0.41700, 100=0.39960, 250=0.36488, 500=0.34752 (USD)", Radiation Hardening=No, REACH SVHC="No SVHC", RoHS=Yes, Stock 1=51, Supplier 1=Digi-Key, Termination=Solder, Voltage Rating=475V, Voltage Rating (AC)=475V
L9: library part CMP-0226-00161-1, "SMD High Current Inductor WE-HCF, L=7.00 µH", Inductance="7.00 ÂµH", ComponentLink1Description="Manufacturer Link", ComponentLink1URL=http://www.we-online.com, ComponentLink2Description=Datasheet, ComponentLink2URL=http://www.we-online.de/katalog/media/pdf/7443630700.pdf, DatasheetVersion="ver 1, Jul-2009", PackageDescription="SMD Inductor, 3-Leads, Body 21.5 x 21.0 mm", PackageReference=WE-HCF-2013, PackageVersion=2009
L300: "Current Transformer 1:50 500Vrms 0.004Ohm Prim. DCR 0.9Ohm Sec. DCR 4000mA Surface Mount", Current Rating=4A, DC Resistance (DCR)=4mR, Frequency=1kHz, Inductance=1.7mH, Manufacturer=Pulse, Max Operating Temperature=130°C, Min Operating Temperature=-40°C, Package Quantity=1100, Supplier Part Number 1=553-3809-1-ND, Category=Inductors, ComponentLink1Description=https://datasheet.ciiva.com/3293/+spm2007-57-3293304.pdf?src-supplier=Avnet, ComponentLink1URL=https://datasheet.ciiva.com/3293/+spm2007-57-3293304.pdf?src-supplier=Avnet, ComponentLink2Description=https://datasheet.ciiva.com/17293/+spm2007-57-17293503.pdf?src-supplier=Avnet+Europe, ComponentLink2URL=https://datasheet.ciiva.com/17293/+spm2007-57-17293503.pdf?src-supplier=Avnet+Europe, Depth=8.25mm, Height=3.4mm, Height - Seated (Max)=3.4mm, Length=8.25mm, Manufacturer Part Number=PA0368.050NLT, Mount="Surface Mount", Number of Pins=4, Packaging="Tape and Reel", Pricing 1="1=2.28000, 10=1.82200, 25=1.48000, 50=1.44220, 100=1.40420, 250=1.36620, 500=1.35482 (USD)", Radiation Hardening=No, RoHS=Yes, Stock 1=2736, Supplier 1=Digi-Key, Termination=SMD/SMT, Turns Ratio=1:50, Width=8.25mm
MH300 MH301 MH302 MH303 MH304: "matching hole 2.5 hole, 4mm pad (round)"
P300 P303: "Test point 1.7mm"
P301 P302: "Test point 4.5mm hole 3mm square connector with vias"
P306 P307: "Test point 1.5mm"
P308 P309 P310 P311: "Test point 1mm"
Q300 Q301: "N-channel SiC power MOSFET ROHM. Vdss 1200V, Rdson 105mOhm, Id 24A", Current - Continuous Drain (Id) @ 25°C="24 A", Drain-to-source voltage (Vdss)="1200 V", Drive Voltage="18 V", Input Capacitance (Ciss) (Max) @ Vds="574pF @ 800V", Package/Case=TO-247-4, Supplier Part Number 1=755-SCT3105KRC14, FET Type=N-Channel, Gate Charge (Qg) (Max) @ Vds="51 nC", Rds on @ Id, Vgs="137 mOhm", Supplier 1=Mouser, Supplier 2=Digi-Key, Supplier 3=Farnell, Supplier 4=Newark, Supplier Part Number 2=846-SCT3105KRC14-ND, Supplier Part Number 3=3241766, Supplier Part Number 4=34AH2699, Technology=SiC-FET, Vgs Max="+22 V / -4 V"
R300 R301: library part CMP-1013-00098-1, "10K 0.125W 5% 0805 (2012 Metric)  SMD", Case-EIA=0805, Case-Metric=2012, Power="0.125 W", Tolerance="5 %", Technology=SMT
R302 R303 R304 R305 R306 R307: library part CMP-2003-02243-1, Manufacturer="Vishay Dale", Package=1206, Part Number=CRCW12064M70FKEA
R308: "Varistors 1000V 130pF", Capacitance=130pF, Clamping Current=50A, Clamping Voltage=2.7kV, Current Rating=4.5kA, Manufacturer=Littelfuse, Max Operating Temperature=85°C, Max Varistor Voltage=1.8kV, Max Voltage Rating (AC)=1kV, Max Voltage Rating (DC)=1.2kV, Min Operating Temperature=-55°C, Min Varistor Voltage=1.5kV, Package Quantity=300, Supplier Part Number 1=F3029-ND, Category=Varistors, ComponentLink1Description=https://datasheet.ciiva.com/25604/0900766b81107157-25604568.pdf?src-supplier=RSComponents, ComponentLink1URL=https://datasheet.ciiva.com/25604/0900766b81107157-25604568.pdf?src-supplier=RSComponents, ComponentLink2Description=https://datasheet.ciiva.com/366/littelfuse-mov-la-366032.pdf?src-supplier=Digi-Key, ComponentLink2URL=https://datasheet.ciiva.com/366/littelfuse-mov-la-366032.pdf?src-supplier=Digi-Key, ComponentLink3Description=https://datasheet.ciiva.com/15155/getdatasheetpartid-97401-15155450.pdf?src-supplier=Verical, ComponentLink3URL=https://datasheet.ciiva.com/15155/getdatasheetpartid-97401-15155450.pdf?src-supplier=Verical, ComponentLink4Description=https://datasheet.ciiva.com/16379/la-16379084.pdf?src-supplier=Future+Electronics, ComponentLink4URL=https://datasheet.ciiva.com/16379/la-16379084.pdf?src-supplier=Future+Electronics, ComponentLink5Description=https://datasheet.ciiva.com/8070/482376-8070941.pdf?src-supplier=Element14, ComponentLink5URL=https://datasheet.ciiva.com/8070/482376-8070941.pdf?src-supplier=Element14, ComponentLink6Description=https://datasheet.ciiva.com/4540/littelfuse-mov-la-34212-4540703.pdf?src-supplier=Mouser, ComponentLink6URL=https://datasheet.ciiva.com/4540/littelfuse-mov-la-34212-4540703.pdf?src-supplier=Mouser, Depth=10.8mm, Diameter=14mm, Energy=220J, Lead Free="Lead Free", Lead Pitch=8.5mm, Lead/Base Style=Radial, Manufacturer Part Number=V1000LA80AP, Max Output Current=4.5kA, Max Surge Current=4.5kA, Mount="Through Hole,Radial", Number of Circuits=1, Packaging=Bulk, Pricing 1="1=2,50000, 10=2,26200, 25=2,02000, 100=1,81800, 250=1,61600, 500=1,41400, 1000=1,17160, 2500=1,09080, 5000=1,05040 (USD)", REACH SVHC=Unknown, RoHS=Yes, Stock 1=1833, Supplier 1=Digi-Key, Supplier 2=Arrow, Supplier 3="Future Electronics", Supplier 4=Mouser, Supplier 5=Farnell, Supplier 6=Newark, Supplier 7=Newark, Supplier Part Number 2=V1000LA80AP, Supplier Part Number 3=V1000LA80AP-BOX, Supplier Part Number 4=576-V1000LA80AP, Supplier Part Number 5=1816971, Supplier Part Number 6=80R8723, Supplier Part Number 7=58K7189, Termination=Radial, Thickness=10.8mm, Varistor Voltage=1.8kV, Voltage Rating=1.2kV, Voltage Rating (AC)=1kV, Voltage Rating (DC)=1.2kV, Width=10.8mm
RS300: "Coaxial current shunt SDN-414 T&M (New)", Case/Package=Axial, Manufacturer=Ohmite, Manufacturer Part Number=WHE10RFET, Max Operating Temperature=150°C, Max Power Dissipation=5W, Min Operating Temperature=-55°C, Package Quantity=500, Resistance=10R, Supplier Part Number 1=WHE10RFETCT-ND, Temperature Coefficient=50ppm/°C, Tolerance=1%, Category="Through-Hole Resistors", ComponentLink1Description=https://datasheet.ciiva.com/5635/res-wh-wn-5635598.pdf?src-supplier=Mouser, ComponentLink1URL=https://datasheet.ciiva.com/5635/res-wh-wn-5635598.pdf?src-supplier=Mouser, ComponentLink2Description=https://datasheet.ciiva.com/6495/res-wh-wn-6495224.pdf?src-supplier=Digi-Key, ComponentLink2URL=https://datasheet.ciiva.com/6495/res-wh-wn-6495224.pdf?src-supplier=Digi-Key, ComponentLink3Description=https://datasheet.ciiva.com/6495/res-wh-wn-6495226.pdf?src-supplier=Digi-Key, ComponentLink3URL=https://datasheet.ciiva.com/6495/res-wh-wn-6495226.pdf?src-supplier=Digi-Key, Composition=Wirewound, Diameter=7.5mm, Lead Diameter=1mm, Length=20mm, Number of Pins=2, Number of Terminations=2, Packaging="Tape and Reel", Power rating=5W, Pricing 1="1=1.54000, 10=1.36400, 25=1.25400, 50=1.14400, 100=0.99000, 250=0.83600 (USD)", REACH SVHC=Unknown, RoHS=Yes, Stock 1=228, Supplier 1=Digi-Key, Termination=Axial, Weight=0.080848oz
T300: library part Payton_SMPS_trafo_61446, "1400W SMPS Transformer Payton 61446", Ambient Temperature Range="- 40 °C to 85°C", Dielectric Strength (Pri. to Sec.)="2000 Vrms", Dielectric Strength (Pri.+Sec. to Core)="500 Vdc", Estimated Hot Spot Temperature (With heatsink of 85°C max attached)="110 °C", Estimated Power Losses=15W, Input Voltage="750-1000 Vdc", Operating duty cicle, max.="1 (0,5*2)", Operating Volt-second product, max.="2500 (1250*2) V-usec.", Pri. to half Sec. ratio (Sec current, max. - 7,07 Arms)=24:9, Primary Current, max.="4,07 Arms (4,2 Apeak)", Total Output Power (after rectifier)="1400W (140 Vdc/ 10 Adc)", Transformer Input Voltage="374-499 Vdc", Transformer Operating Frequency="150 kHz", Generic Type=T250AC-24-18C, Mechanical Dimension - Height (For reference only)="32 mm.", Mechanical Dimension - Length (For reference only)="67 mm.", Mechanical Dimension - Width (For reference only)="65 mm.", Topology="Half Bridge"
T301: "FERRITE CORE TOROID 6.44UH T38", Manufacturer=TDK, Package Quantity=2000, Supplier Part Number 1=495-3854-ND, Category=Uncategorized, ComponentLink1Description=http://components.arrow.com/part/dataview/0323_01888516?src-supplier=Arrow+Europe, ComponentLink1URL=http://components.arrow.com/part/dataview/0323_01888516?src-supplier=Arrow+Europe, ComponentLink2Description=https://www.verical.com/server-webapp/html/getDatasheet?partID=477647&src-supplier=Verical, ComponentLink2URL=https://www.verical.com/server-webapp/html/getDatasheet?partID=477647&src-supplier=Verical, ComponentLink3Description=http://www.epcos.com/inf/80/db/fer_07/r_16.pdf?src-supplier=Avnet, ComponentLink3URL=http://www.epcos.com/inf/80/db/fer_07/r_16.pdf?src-supplier=Avnet, ComponentLink4Description=https://en.tdk.eu/download/531586/2d679ff7e70f74dfb98dc2a4732cca7b/pdf-toroids-general-information.pdf?src-supplier=Digi-Key, ComponentLink4URL=https://en.tdk.eu/download/531586/2d679ff7e70f74dfb98dc2a4732cca7b/pdf-toroids-general-information.pdf?src-supplier=Digi-Key, Diameter=17.2mm, Manufacturer Part Number=B64290L0045X038, Packaging=Bulk, Pricing 1="1=0,79000, 10=0,71000, 25=0,52600, 50=0,49980, 100=0,44710, 250=0,42080, 500=0,39450, 1000=0,34190, 5000=0,32875 (USD)", RoHS=Yes, Shape=Cylindrical, Stock 1=6794, Supplier 1=Digi-Key, Supplier 2=Arrow, Supplier 3=Farnell, Supplier 4=Newark, Supplier Part Number 2=B64290L0045X038, Supplier Part Number 3=2673401, Supplier Part Number 4=02AC3431

## Free pads (board coordinates)
  round 0.7 hole 1 slot 5 at 90 deg unplated: 9(42.375,93.45)
  round 0.7 hole 1 slot 10 at 90 deg unplated: 9(45.025,120.4)
  round 0.7 hole 1 slot 8 at 90 deg unplated: 9(45.925,71.85)
  round 0.7 hole 1 slot 8 at 0 deg unplated: 9(46.625,51.275)
  round 0.7 hole 1 slot 40 at 90 deg unplated: 9(49.35,83.325)
  round 0.7 hole 1 slot 35 at 90 deg unplated: 9(52.675,82.275)
  round 0.7 hole 1.5 slot 6 at 0 deg unplated: 9(52.725,120.925) 9(52.825,115.825)
  round 0.7 hole 1.5 slot 8 at 0 deg unplated: 9(64.525,64.5) 9(76.625,64.5) 9(184.625,57.95)
  round 0.7 hole 1.5 slot 8 at 90 deg unplated: 9(67.1,75.936) 9(84.47,75.936)
  round 0.7 hole 1.5 slot 5 at 90 deg unplated: 9(71.35,96.125) 9(71.4,85.4)
  round 0.7 hole 1.5 slot 25 at 90 deg unplated: 9(90.9,86.8)
  round 0.7 hole 1.5 slot 6 at 90 deg unplated: 9(181.325,60.225)

## Via types
v1: diameter 0.5, hole 0.3, Top Layer to Bottom Layer, 325 vias
v2: diameter 1.27, hole 0.711, Top Layer to Bottom Layer, 9 vias

## Nets (pads, with @x,y where several pads share a name; then routed paths per layer and width w, separated by ;. In a path a pad name is that pad's centre, name@x,y a point inside that pad or via, vN(x,y) a via of type N, cw(c..) or ccw(c..) an arc to the next point about the centre after c; other vN are vias at no path point)
ACres2_N: P307.1 T300.1 | length 56.6
  Top Layer w2.54: P307.1 92.2,59.825 92.8,60.425 92.8,70.975 100.81,78.985 T300.1
ACres_N: C318.1 C319.2 J303.1 P306.1 P309.1 P310.1 | length 102.2
  Top Layer w0.508: C319.2@54.96,66.185 54.585,66.185 54.364,65.964 54.364,64.739 53.525,63.9 52.225,63.9 51.3,64.825 51.3,103.775 v2(55.575,108.05) ; C319.2@55.3,66.425 C319.2 ; C318.1 C318.1@87.8,66.3
  Top Layer w1.27: P309.1 C319.2@55.3,66.425 ; P310.1@87.8,64.525 C318.1@87.8,66.3
  Top Layer w2.54: P306.1 66.825,47.5 70.725,51.4 70.725,66.225
  Bottom Layer w0.508: J303.1 56.06,118.365 57.275,117.15 57.275,110.15 55.575,108.45 v2(55.575,108.05)
ACt_P: L300.4 Q300.2 Q301.1
  other v1: 69.6,70.8 70.8,70.8 72,70.8 73.2,70.8 74.4,70.8 75.6,70.8 76.8,70.8 78,70.8 79.2,70.8 80.4,70.8 81.6,70.8 82.8,70.8 68.4,72 69.6,72 70.8,72 72,72 73.2,72 74.4,72 75.6,72 76.8,72 78,72 79.2,72 80.4,72 81.6,72 82.8,72 68.4,73.2 69.6,73.2 70.8,73.2 72,73.2 73.2,73.2 74.4,73.2 80.4,73.2 81.6,73.2 82.8,73.2 68.4,74.4 70.8,74.4 72,74.4 73.2,74.4 72,75.6
ACtp_N: L300.1 T300.5
ACts_M: C320.1 C321.1 C322.1 C323.1 J307.1 J307.2 J307.3 J307.4 J307.5 J307.6 T300.8
  other v1: 157.2,82.8 158.4,82.8 163.2,82.8 157.2,84 158.4,84 157.2,85.2 158.4,85.2 157.2,86.4 158.4,86.4 157.2,87.6 158.4,87.6 159.6,87.6 163.2,87.6 157.2,88.8 158.4,88.8 159.6,88.8 160.8,88.8 162,88.8 163.2,88.8 157.2,90 158.4,90 159.6,90 160.8,90 162,90 163.2,90 158.4,91.2 159.6,91.2 160.8,91.2 162,91.2 163.2,91.2 159.6,92.4 160.8,92.4 162,92.4 163.2,92.4
ACts_N: D300.3 T300.10
  other v1: 184.4,78.22 185.6,78.22 186.8,78.22 188,78.22 189.2,78.22 184.4,79.42 185.6,79.42 186.8,79.42 188,79.42 189.2,79.42 184.4,80.62 185.6,80.62 186.8,80.62 188,80.62 189.2,80.62 184.4,81.82 185.6,81.82 186.8,81.82 188,81.82 189.2,81.82 185.6,83.02 186.8,83.02 188,83.02 189.2,83.02 185.6,84.22 186.8,84.22 188,84.22 189.2,84.22 185.6,85.42 186.8,85.42 188,85.42 189.2,85.42 185.6,86.62 186.8,86.62 188,86.62 189.2,86.62 185.6,87.82 186.8,87.82 188,87.82 189.2,87.82 185.6,89.02 186.8,89.02 188,89.02 189.2,89.02 185.6,90.22 186.8,90.22 188,90.22 189.2,90.22 185.6,91.42 186.8,91.42 188,91.42 189.2,91.42 185.6,92.62 186.8,92.62 188,92.62 189.2,92.62 185.6,93.82 189.2,93.82 189.2,95.02 185.6,96.22 189.2,96.22 186.8,97.42 188,97.42
ACts_P: D300.1 T300.6
CHASIS: C324.2 C325.1 | length 16.3
  Bottom Layer w1.27: C325.1@43.04,117.322 43.04,117.253 40.825,115.039 40.825,105.637 C324.2@43.44,103.022
DC_N_shunt: Q301.2 RS300.2
  other v1: 58.7,80.6 59.45,80.6 60.2,80.6 60.95,80.6 61.7,80.6 58.7,82.1 61.7,82.1 58.7,83.6 59.45,83.6 60.2,83.6 60.95,83.6 61.7,83.6
DCf_P: D300.2 L9.1
  other v1: 177.37,85.38 177.37,86.58 177.37,87.78 177.37,88.98 177.37,90.18 179.77,91.38 180.97,91.38 182.17,91.38 179.77,92.58 180.97,92.58 182.17,92.58 179.77,93.78 179.77,94.98 179.77,96.18 180.97,97.38 182.17,97.38
DCin_N: P303.1 R308.1 T301.3 | length 42.6
  Top Layer w1.27: T301.3@44.351,94.145 44.351,92.849 47.475,89.725 47.475,75.325 47.485,75.315 47.485,72.635 47.475,72.625 47.475,59.014 48.112,58.377 48.112,58.162 R308.1@48.067,58.117 ; P303.1 47.502,54.025 48.175,54.698 R308.1
DCin_P: P300.1 R308.2 T301.1 | length 7.5
  Bottom Layer w1.27: P300.1@42.05,70.9 42.05,67.439 42.675,66.814 R308.2 ; T301.1 42.025,73.95 42.025,70.95 P300.1@42.075,70.9
DCl_N: J306.1 J306.2 J306.3 J306.4 J306.5 J306.6 P302.1
  other v1: 183.585,52.375 184.506,52.375 185.435,52.375 186.435,52.375 187.4,52.375 183.585,53.331 187.4,53.331 183.585,54.3 187.4,54.3 183.585,55.25 187.4,55.25 183.585,56.175 184.506,56.175 185.435,56.175 186.435,56.175 187.4,56.175
DCl_P: C320.2 C321.2 C322.2 C323.2 J302.1 L9.2 P301.1 | length 2.9
  Bottom Layer w1.27: 183.825,67 185.206,67 186.25,65.956
  other v1: 183.585,60.2 184.506,60.2 185.435,60.2 186.435,60.2 187.4,60.2 183.585,61.156 187.4,61.156 183.585,62.125 187.4,62.125 183.585,63.075 187.4,63.075 183.585,64 184.506,64 185.435,64 186.435,64 187.4,64 171.3,84.5 172.3,84.5 173.3,84.5 174.3,84.5 171.3,91.5 172.3,91.5 173.3,91.5 171.3,92.5 172.3,92.5 171.3,93.5
DCo_M: C300.1 C301.1 C302.1 C303.1 C304.1 C305.1 C306.1 C307.1 C310.2 C311.2 C312.2 C313.2 C314.2 C315.2 C316.2 C317.2 R304.2 R305.1 | length 2.1
  Top Layer w1.27: C314.2@55.415,90.5 C314.2
  Bottom Layer w0.508: R304.2@46.5,117.725 46.513,117.737 48.487,117.737 R305.1@48.5,117.75
DCo_N: C308.1 C309.1 C310.1 C311.1 C312.1 C313.1 C314.1 C315.1 C316.1 C317.1 C319.1 C325.2 J301.1 J305.1 P311.1 R307.2 RS300.1 T301.4 | length 86.7
  Top Layer w1.27: T301.4 46.45,98.384 47.05,98.984 47.05,105.5 45.703,106.847 45.703,113.004 46.625,113.926 46.625,121.825 48.55,123.75 C325.2@50.7,123.75
  Top Layer w2.54: C325.2@50.7,123.75 53.132,123.75 J305.1 ; v1(58.1,98) v1(59.1,98) v1(60.1,98) v1(61.1,98) v1(62.1,98) v1(63.1,98) ; v2(63.1,109.9) v1(63.1,98) ; v2@63.348,109.76 v2@64.275,109.76 ; v1(66.1,98) v1(65.1,98) v1(63.1,98)
  Bottom Layer w0.254: J305.1@53.132,123.75 J305.1
  Bottom Layer w0.508: R307.2@49.825,124.675 49.825,124.325 50.021,124.129 50.046,124.129 50.425,123.75 J305.1@53.132,123.75
  Bottom Layer w2.54: J305.1 53.617,123.625 61.281,123.625 61.298,123.642 J301.1 63.775,121.604 63.775,109.822 ; v2@63.348,109.76 63.348,110.249 63.775,109.822 ; 63.775,109.76 63.775,109.822 ; v2@64.275,109.76 63.837,109.76 63.775,109.822
  other v1: 54.2,80.6 54.95,80.6 55.7,80.6 56.45,80.6 57.2,80.6 54.2,81.35 57.2,81.35 54.2,82.1 57.2,82.1 54.2,82.85 57.2,82.85 54.2,83.6 54.95,83.6 55.7,83.6 56.45,83.6 57.2,83.6 54.1,85 55.1,85 56.1,85 57.1,85 58.1,85 59.1,85 60.1,85 61.1,85 62.1,85 63.1,85 64.1,85 65.1,85 66.1,85 67.1,85 54.1,98 55.1,98 56.1,98 57.1,98 67.1,98
  other v2: 64.525,109.9
DCo_P: C300.2 C301.2 C302.2 C303.2 C304.2 C305.2 C306.2 C307.2 C308.2 C309.2 C318.2 C324.1 J300.1 J304.1 P308.1 Q300.1 R302.1 T301.2 | length 87.8
  Top Layer w0.254: 88.15,73.05 88.225,72.975
  Top Layer w1.27: C324.1@51.1,109.45 51.1,110.948 J304.1
  Top Layer w2.54: J304.1@53.437,113.426 57.377,113.426 60.391,116.44 69.948,116.44 71.476,114.912 71.476,103.269 74.975,99.77 v1(74.975,98.05) ; v1(83.975,98.05) 83.975,100.16 J300.1@84.366,100.551
  Bottom Layer w1.27: T301.2@44.175,74.22 44.149,74.22 44.149,74.576 40.775,77.95 40.775,97.025 43.2,99.45 44.905,99.45 46.997,101.542 46.997,105.347 51.087,109.437 51.087,109.449 C324.1@51.165,109.528
  other v1: 85.975,74.05 87.975,74.05 85.975,78.05 86.975,78.05 87.975,78.05 85.975,79.05 86.975,79.05 87.975,79.05 85.975,80.05 86.975,80.05 87.975,80.05 84.975,81.05 85.975,81.05 86.975,81.05 87.975,81.05 83.975,82.05 84.975,82.05 85.975,82.05 86.975,82.05 87.975,82.05 74.975,83.05 75.975,83.05 76.975,83.05 77.975,83.05 78.975,83.05 79.975,83.05 80.975,83.05 81.975,83.05 82.975,83.05 83.975,83.05 84.975,83.05 85.975,83.05 86.975,83.05 87.975,83.05 74.975,84.05 75.975,84.05 76.975,84.05 77.975,84.05 78.975,84.05 79.975,84.05 80.975,84.05 81.975,84.05 82.975,84.05 83.975,84.05 84.975,84.05 85.975,84.05 86.975,84.05 87.975,84.05 74.975,85.05 75.975,85.05 76.975,85.05 77.975,85.05 78.975,85.05 79.975,85.05 80.975,85.05 81.975,85.05 82.975,85.05 83.975,85.05 84.975,85.05 85.975,85.05 86.975,85.05 87.975,85.05 75.975,98.05 76.975,98.05 77.975,98.05 78.975,98.05 79.975,98.05 80.975,98.05 81.975,98.05 82.975,98.05 84.975,98.05 85.975,98.05 86.975,98.05 87.975,98.05
G1: J309.2 Q300.4 R300.1 | length 3.2
  Top Layer w0.508: Q300.4@76.955,75.057 Q300.4@76.955,76.011
  Top Layer w1.27: Q300.4@76.955,76.011 76.955,78.251 J309.2@76.98,78.276
G2: J310.2 Q301.4 R301.1 | length 3.7
  Top Layer w0.508: Q301.4 59.44,75.182 Q301.4@59.769,74.853
  Top Layer w1.27: J310.2@59.17,78.276 59.195,78.251 59.195,76.829 59.44,76.584 Q301.4
GND_18V: J308.2 J311.2 J312.1 | length 145.5
  Top Layer w0.508: v2(56.025,60.85) 60.839,60.85 ; J312.1 61.98,61.991 60.839,60.85 ; v2@65.215,58.2 63.489,58.2 60.839,60.85
  Bottom Layer w0.508: v2(56.025,60.85) 54.025,60.85 51.65,63.225 51.65,100.722 53.778,102.85 65.25,102.85 70.7,108.3 70.7,123.284 72.566,125.15 97.65,125.15 99.75,123.05 99.75,118.65 102.377,116.023 J308.2 ; v2(65.2,58.175) 76.375,58.175 v2@76.825,58.625
  other v2: 76.7,58.575
NetL300_2: L300.2 P304.1 | length 4
  Top Layer w0.508: 102.525,56.55 102.77,56.305 102.77,53.02 P304.1
NetL300_3: L300.3 P305.1 | length 4.4
  Top Layer w0.508: 96.525,56.55 96.525,54.157 P305.1
NetR302_2: R302.2 R303.1 | length 1.5
  Bottom Layer w0.508: R302.2 48.271,111.196 48.271,112.054 48.467,112.25 R303.1@48.525,112.25
NetR303_2: R303.2 R304.1 | length 2.1
  Bottom Layer w0.508: R304.1@46.5,115.025 46.538,114.987 48.488,114.987 R303.2@48.525,114.95
NetR305_2: R305.2 R306.1 | length 2
  Bottom Layer w0.508: R306.1@46.525,120.45 R305.2@48.5,120.45
NetR306_2: R306.2 R307.1 | length 2
  Bottom Layer w0.508: R306.2@46.525,123.15 46.875,123.15 47.071,123.346 47.071,124.621 R307.1@47.125,124.675
S1: J309.1 Q300.3 R300.2 | length 2.6
  Top Layer w0.508: Q300.3@79.27,75.786 Q300.3 Q300.3@79.47,75.986 ; J309.1@79.47,78.226 J309.1@79.52,78.276
  Top Layer w1.27: Q300.3@79.47,75.986 J309.1@79.47,78.226
S2: J310.1 Q301.3 R301.2 | length 2.3